# Altium PCB EST_MainV20.PcbDoc (part 1 of 8)
Units mm, origin at the board's own origin, x right, y up, seen from the top; angles counter-clockwise.
Board outline 69.72 x 115.32 mm, 2 copper layers (Top Layer, Bottom Layer); 330 components, 239 nets, 1066 pads, 416 vias.
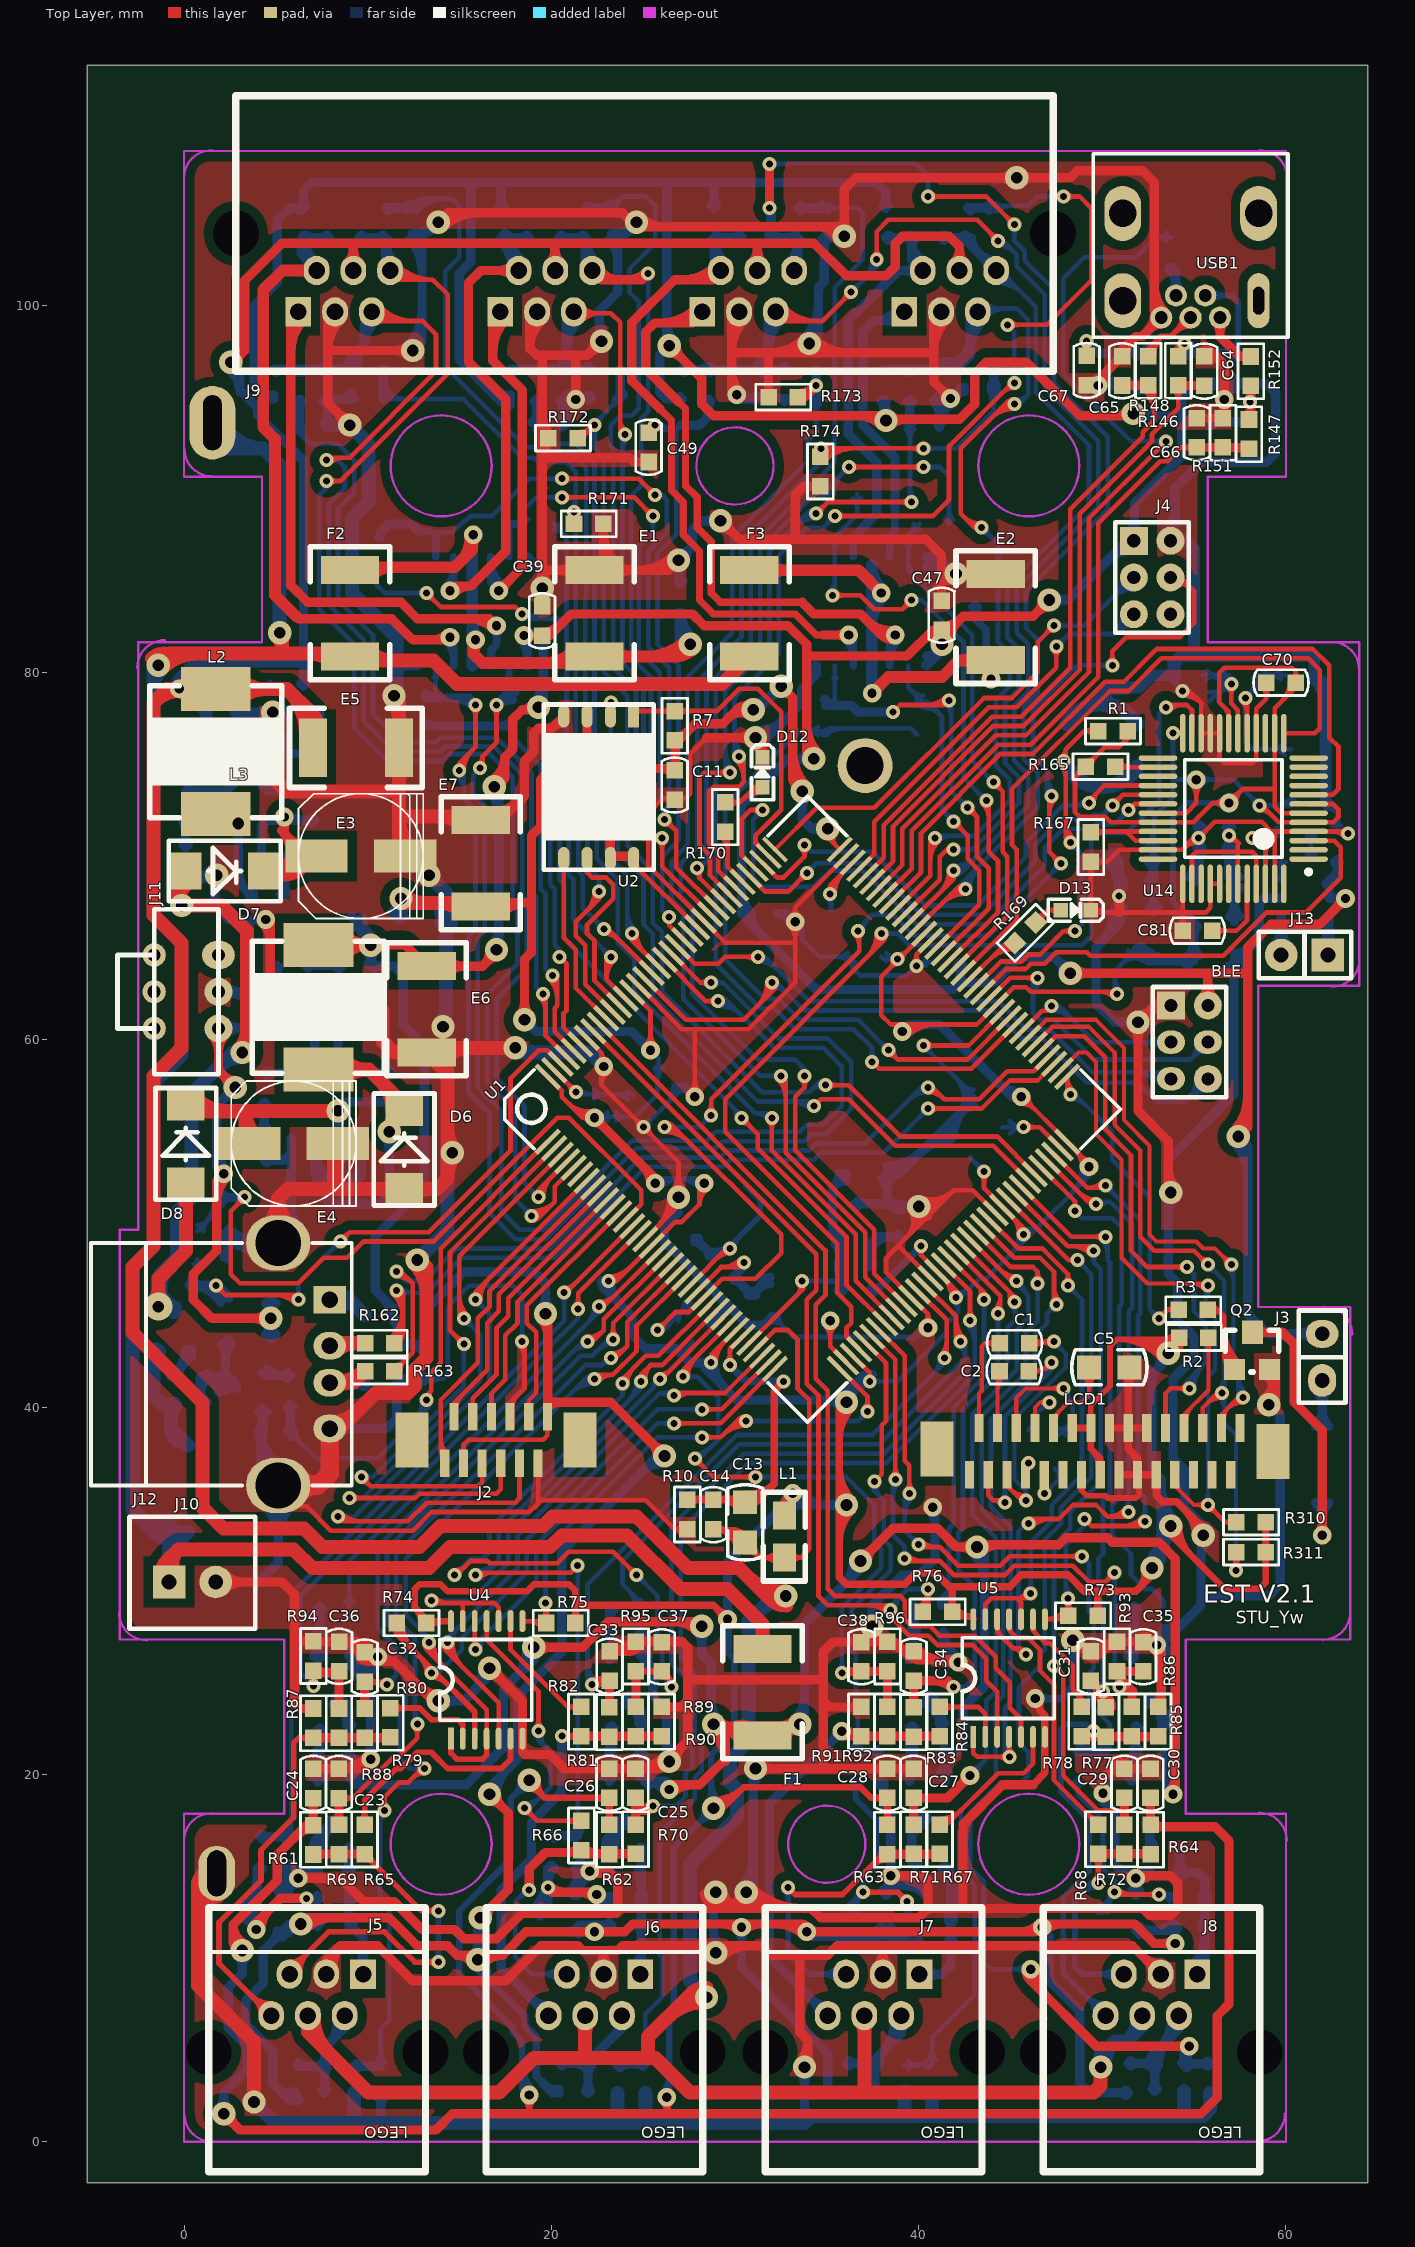
[diagram p0: Top Layer view]
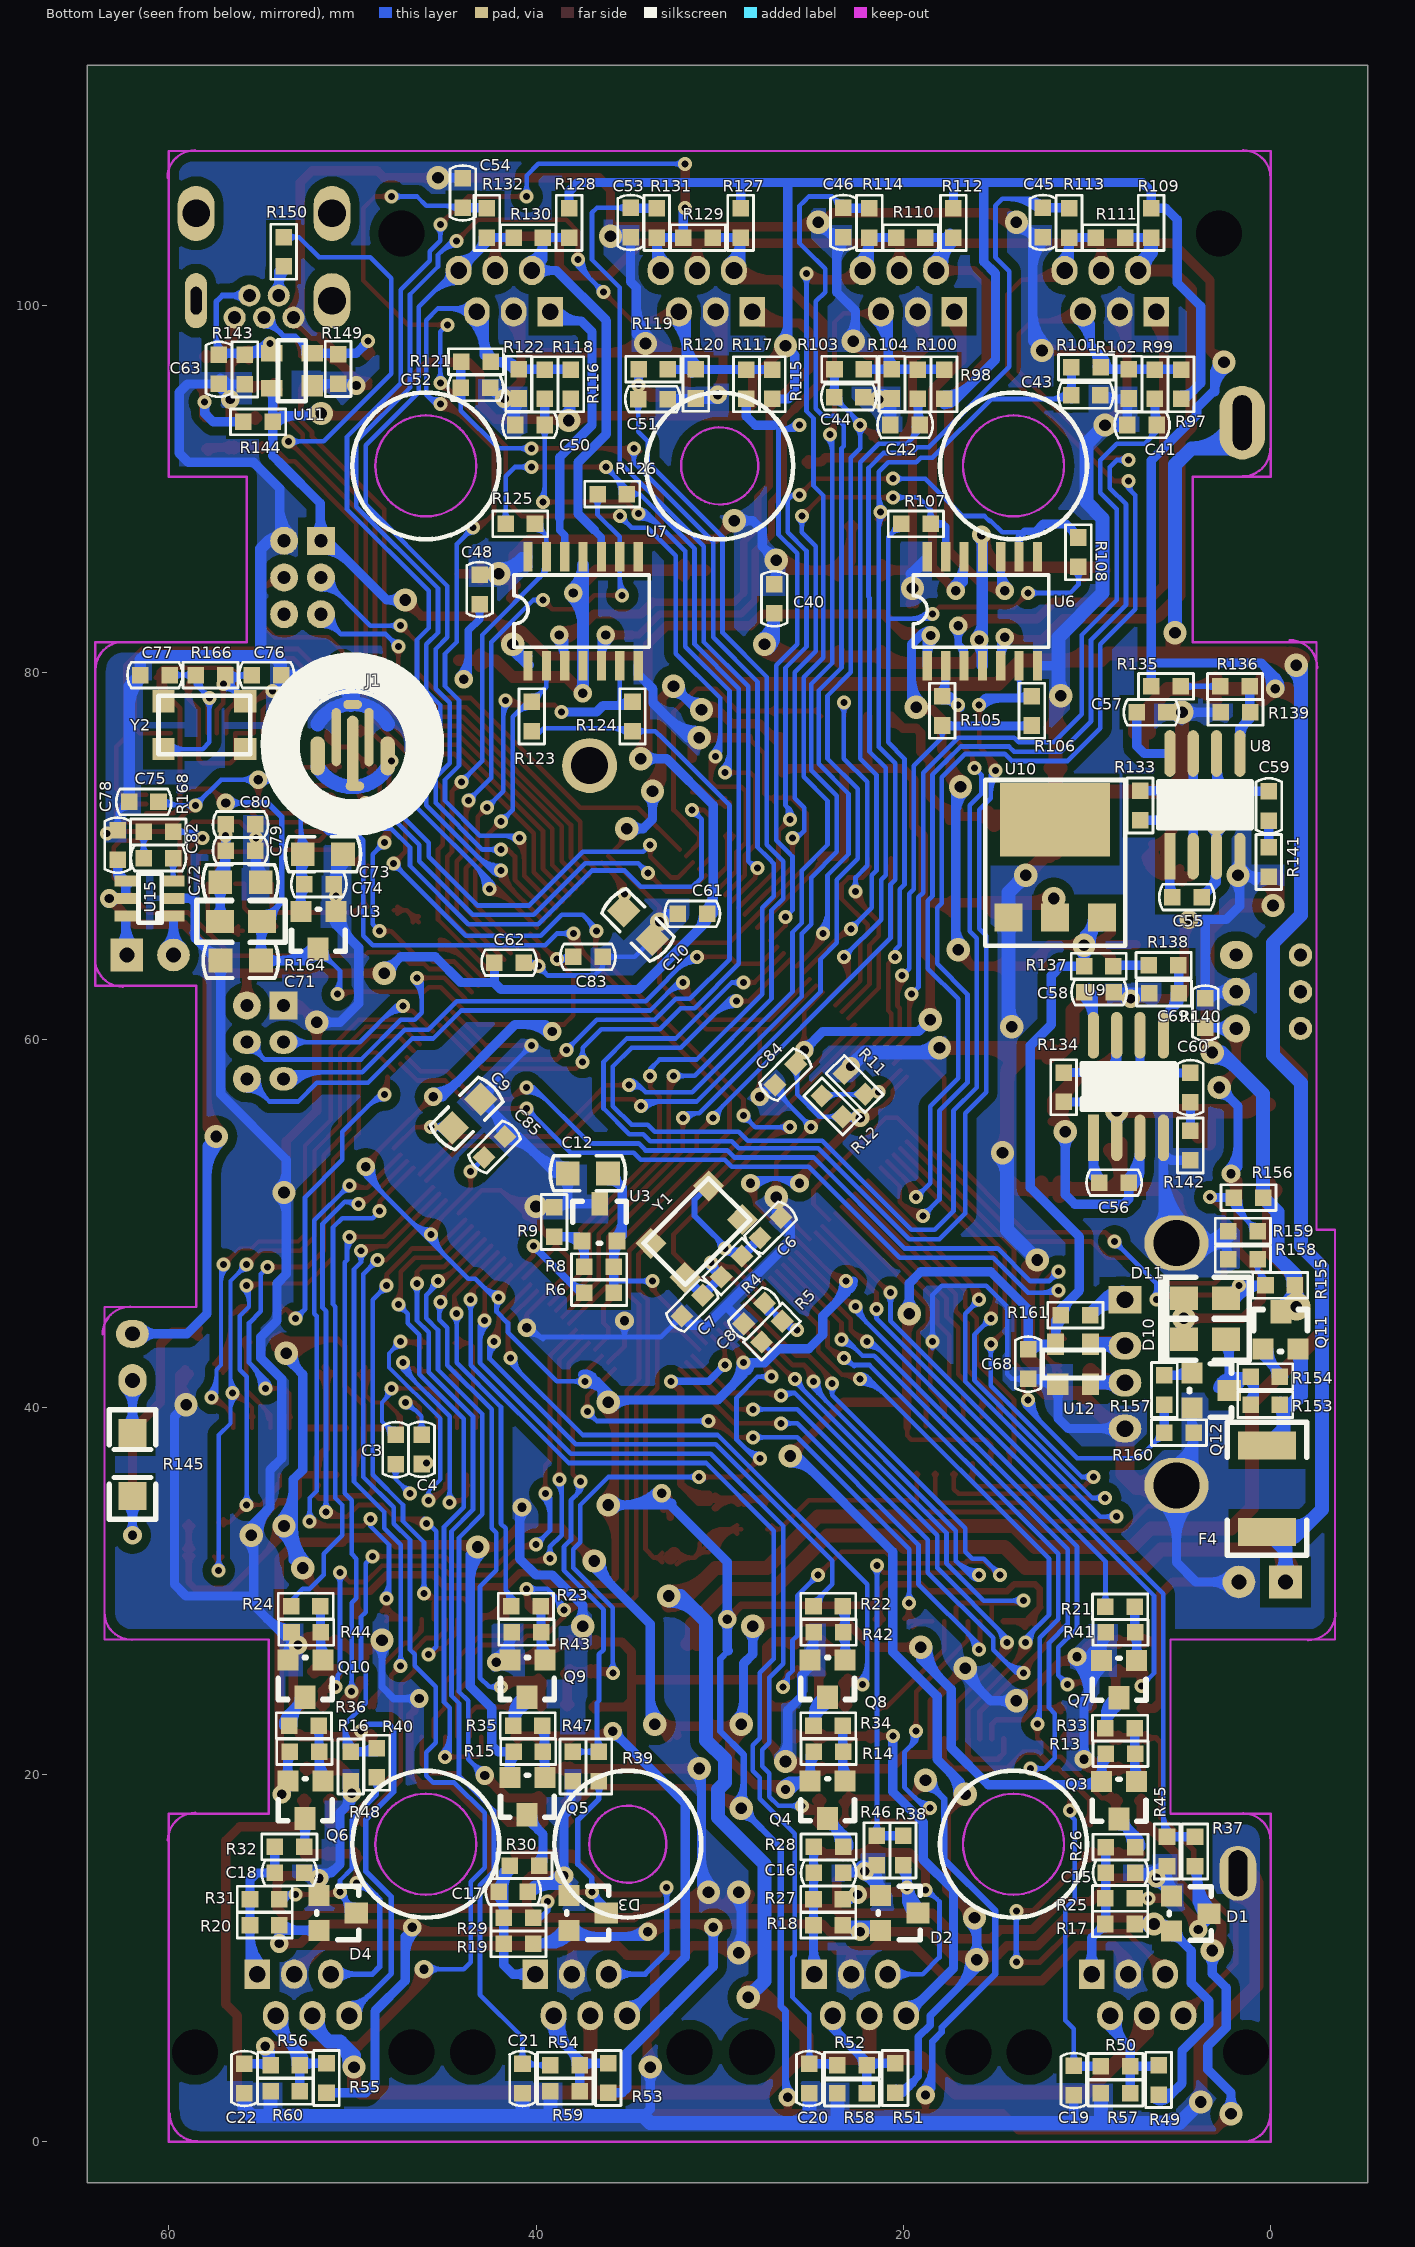
[diagram p1: Bottom Layer view, seen from below]

## Layer stack, top to bottom
Top Layer: signal copper 0.0356
Dielectric: prepreg 0.32, FR-4, Dk 4.8
Bottom Layer: signal copper 0.0356

## Board outline
-5.278,113.074 64.445,113.074 64.445,-2.242 -5.278,-2.242

## Design rules (kind name [scope] priority, off if disabled: settings)
Clearance Clearance_1 [All] p1 off: gap=0.508
Clearance [All] p2: gap=0.152
ComponentClearance [All] p1 off: gap=0.254 collisioncheckmode=3 verticalgap=0.254 showdistances=FALSE
HoleSize [All] p1: absolutevalues=TRUE maxlimit=3.81 minlimit=0.025 maxpercent=80.000 minpercent=20.000
HoleToHoleClearance [All] p1 off: gap=0.254 allowstackedmicrovias=TRUE
MinimumSolderMaskSliver [All] p1 off: minsoldermaskwidth=0.254
PlaneConnect [All] p1: planeconnectstyle=Direct reliefexpansion=0.508 reliefentries=4 reliefconductorwidth=0.254 reliefairgap=0.254
PolygonConnect [All] p1: connectstyle=Direct reliefconductorwidth=0.254 reliefentries=4 polygonreliefangle="90 Angle"
RoutingVias [All] p1: holewidth=0.3 width=0.42 viastyle="Through Hole" minholewidth=0.3 minwidth=0.42 maxholewidth=1.524 maxwidth=3.81
SilkToSilkClearance [All] p1 off: silktosilkclearance=0.254
SilkscreenOverComponentPads [All] p1: minsilkscreentomaskgap=0.254
SolderMaskExpansion [All] p1: expansion=0.102
TestPointUsage [All] p1: valid=0 allowmultiple=FALSE
Testpoint [All] p1: side=15 testpointundercomponent=TRUE minsize=1.016 maxsize=2.54 preferedsize=1.524 minholesize=0 maxholesize=1.016 preferedholesize=0.813 testpointgrid=0.025 style=1023 order=0-112345678
Width [All] p1: maxlimit=2.54 minlimit=0.2 preferedwidth=0.2 toplayer_prefwidth=0.5 minimp=50.000000 maximp=50.000000 favimp=50.000000
17 further rules are at their usual default settings.

## Classes and differential pairs
component class Designator1: C15 C16 C17 C18 C19 C20 C21 C22 C23 C24 C25 C26 C27 C28 C29 C30 C31 C32 C33 C34 C35 C36 C37 C38 D1 D2 D3 D4 F1 J5 J6 J7 J8 Q3 Q4 Q5 Q6 Q7 Q8 Q9 Q10 R13 R14 R15 R16 R17 R18 R19 R20 R21 R22 R23 R24 R25 R26 R27 R28 R29 R30 R31 R32 R33 R34 R35 R36 R37 R38 R39 R40 R41 R42 R43 R44 R45 R46 R47 R48 R49 R50 R51 R52 R53 R54 R55 R56 R57 R58 R59 R60 R61 R62 R63 R64 R65 R66 R67 R68 R69 R70 R71 R72 R73 R74 R75 R76 R77 R78 R79 R80 R81 R82 R83 R84 R85 R86 R87 R88 R89 R90 R91 R92 R93 R94 R95 R96 U4 U5
component class Designator2: C39 C40 C41 C42 C43 C44 C45 C46 C47 C48 C49 C50 C51 C52 C53 C54 E1 E2 F2 F3 J9 R97 R98 R99 R100 R101 R102 R103 R104 R105 R106 R107 R108 R109 R110 R111 R112 R113 R114 R115 R116 R117 R118 R119 R120 R121 R122 R123 R124 R125 R126 R127 R128 R129 R130 R131 R132 R171 R172 R173 R174 U6 U7
component class Designator3: C70 C71 C72 C73 C74 C75 C76 C77 C78 C79 C80 C81 C82 J13 R164 R165 R166 R167 R168 U13 U14 U15 Y2
component class EST_MainV20: BLE C1 C2 C3 C4 C5 C6 C7 C8 C9 C10 C11 C12 C13 C14 C83 C84 C85 D12 D13 J1 J2 J3 J4 L1 LCD1 Q2 R1 R2 R3 R4 R5 R6 R7 R8 R9 R10 R11 R12 R145 R169 R170 R310 R311 U1 U2 U3 Y1
component class Designator4: C55 C56 C57 C58 C59 C60 C61 C62 C63 C64 C65 C66 C67 C68 C69 D6 D7 D8 D10 D11 E3 E4 E5 E6 E7 F4 J10 J11 J12 L2 L3 Q11 Q12 R133 R134 R135 R136 R137 R138 R139 R140 R141 R142 R143 R144 R146 R147 R148 R149 R150 R151 R152 R153 R154 R155 R156 R157 R158 R159 R160 R161 R162 R163 U8 U9 U10 U11 U12 USB1

## Components (designator, comment, footprint, x,y, rotation, side; value= is the part's Value field where it differs from the comment)
BLE "CON6" H2_2.0mm_2*3#1 53.746,61.874 r270 top locked
C1 "105" CAP_0603 45.212,43.485 r0 top
C2 "105" CAP_0603 45.212,41.961 r180 top
C3 "105" CAP_0603 47.65,37.694 r270 bottom
C4 "105" CAP_0603 46.228,37.694 r90 bottom
C5 "105" CAP_0805 50.394,42.164 r180 top
C6 "20pF" CAP_0603 27.229,49.784 r315 bottom
C7 "20pF" CAP_0603 31.496,45.517 r135 bottom
C8 "104" CAP_0603 28.124,45.093 r135 bottom
C9 "20pF" CAP_0805 43.79,55.982 r135 bottom
C10 "20pF" CAP_0805 34.442,66.243 r45 bottom
C11 "104" CAP_0603 26.721,73.863 r90 top
C12 "20pF" CAP_0805 37.186,52.73 r180 bottom
C13 "20pF" CAP_0805 30.556,33.731 r270 top
C14 "104" CAP_0603 28.829,34.138 r90 top
C15 "330pF" CAP_0603 8.184,14.649 r180 bottom
C16 "330pF" CAP_0603 24.079,14.63 r180 bottom
C17 "330pF" CAP_0603 41.25,13.614 r180 bottom
C18 "330pF" CAP_0603 53.442,14.63 r180 bottom
C19 "330pF" CAP_0603 10.724,3.346 r270 bottom
C20 "330pF" CAP_0603 25.121,3.454 r270 bottom
C21 "330pF" CAP_0603 40.742,3.454 r270 bottom
C22 "330pF" CAP_0603 55.88,3.454 r270 bottom
C23 "10pF" CAP_0603 8.438,19.5 r90 top
C24 "104" CAP_0603 7.041,19.5 r90 top
C25 "10pF" CAP_0603 24.587,19.507 r90 top
C26 "104" CAP_0603 23.165,19.507 r90 top
C27 "10pF" CAP_0603 39.726,19.507 r90 top
C28 "104" CAP_0603 38.303,19.507 r90 top
C29 "10pF" CAP_0603 51.206,19.507 r90 top
C30 "104" CAP_0603 52.629,19.507 r90 top
C31 "10pF" CAP_0603 49.378,25.908 r270 top
C32 "10pF" CAP_0603 9.835,25.85 r270 top
C33 "10pF" CAP_0603 23.165,25.908 r270 top
C34 "10pF" CAP_0603 39.726,25.908 r270 top
C35 "10pF" CAP_0603 52.222,26.416 r270 top
C36 "47pF" CAP_0603 8.438,26.434 r270 top
C37 "10pF" CAP_0603 26.01,26.416 r270 top
C38 "10pF" CAP_0603 36.881,26.416 r270 top
C39 "104" CAP_0603 19.507,82.804 r90 top
C40 "104" CAP_0603 27.026,84.023 r270 bottom
C41 "100pF" CAP_0603 7.01,93.472 r180 bottom
C42 "100pF" CAP_0603 19.914,93.472 r180 bottom
C43 "100pF" CAP_0603 10.058,95.098 r0 bottom
C44 "100K" CAP_0603 22.962,94.996 r0 bottom
C45 "100pF" CAP_0603 12.395,104.496 r90 bottom
C46 "100pF" CAP_0603 23.266,104.496 r90 bottom
C47 "104" CAP_0603 41.25,83.109 r90 top
C48 "104" CAP_0603 43.078,84.531 r270 bottom
C49 "100pF" CAP_0603 25.298,92.253 r90 top
C50 "100pF" CAP_0603 40.335,93.472 r180 bottom
C51 "100K" CAP_0603 33.63,94.894 r0 bottom
C52 "100K" CAP_0603 43.282,95.504 r0 bottom
C53 "100pF" CAP_0603 34.849,104.496 r90 bottom
C54 "100pF" CAP_0603 43.993,106.121 r270 bottom
C55 "103" CAP_0603 4.572,67.767 r180 bottom
C56 "103" CAP_0603 8.534,52.222 r180 bottom
C57 "104" CAP_0603 6.502,77.826 r180 bottom
C58 "471" CAP_0603 9.347,62.586 r180 bottom
C59 "3.9nF" CAP_0603 0.102,72.746 r270 bottom
C60 "3.9nF" CAP_0603 4.369,57.404 r270 bottom
C61 "104" CAP_0603 31.496,66.853 r180 bottom
C62 "104" CAP_0603 41.453,64.211 r0 bottom
C63 "15P" CAP_0603 57.277,96.52 r270 bottom
C64 "15P" CAP_0603 55.55,96.418 r270 top
C65 "15P" CAP_0603 51.079,96.418 r90 top
C66 "104" CAP_0603 55.143,93.066 r270 top
C67 "15P" CAP_0603 49.149,96.437 r90 top
C68 "10uF" CAP_0603 13.208,42.349 r270 bottom
C69 "104" CAP_0603 3.556,61.468 r270 bottom
C70 "104" CAP_0603 59.741,79.451 r180 top
C71 "10uF" CAP_0805 56.083,64.313 r180 bottom
C72 "10uF" CAP_0805 56.083,68.58 r0 bottom
C73 "10uF" CAP_0805 51.613,70.104 r180 bottom
C74 "104" CAP_0603 51.816,68.478 r0 bottom
C75 "104" CAP_0603 61.366,72.949 r180 bottom
C76 "20pF" CAP_0603 54.661,79.858 r0 bottom
C77 "20pF" CAP_0603 60.757,79.858 r180 bottom
C78 "104" CAP_0603 62.789,70.612 r270 bottom
C79 "104" CAP_0603 56.083,70.307 r0 bottom
C80 "104" CAP_0603 56.083,71.73 r0 bottom
C81 "105" CAP_0603 55.169,65.938 r0 top
C82 "104" CAP_0603 60.554,69.901 r0 bottom
C83 "104" CAP_0603 37.186,64.516 r180 bottom
C84 "104" CAP_0603 26.416,58.115 r315 bottom
C85 "104" CAP_0603 42.266,54.153 r135 bottom
D1 "BAT54S" BAT54S 3.358,13.887 r270 bottom
D2 "BAT54S" BAT54S 19.202,13.919 r270 bottom
D3 "BAT54S" BAT54S 36.17,13.919 r270 bottom
D4 "BAT54S" BAT54S 49.784,13.919 r270 bottom
D6 "1N5819" 1N4007SMD 11.989,52.121 r90 top
D7 "1N4007" 1N4007SMD 0.305,69.19 r0 top
D8 "1N4007" 1N4007SMD 0.102,52.426 r90 top
D10 "1N4007" LED-0805 2.438,43.688 r0 bottom
D11 "1N4007" LED-0805 2.438,45.923 r0 bottom
D12 "LED" LED-0603 31.496,74.574 r90 top
D13 "LED" LED-0603 48.565,67.056 r0 top
E1 "100uF/16V" 1812 22.352,80.874 r90 top
E2 "100uF/16V" 1812 44.196,80.67 r90 top
E3 "220uF" KLF_CD0.254 7.214,70.002 r0 top
E4 "220uF" KLF_CD0.254 3.556,54.356 r0 top
E5 "220uF" 1812 7.01,75.895 r0 top
E6 "220uF" 1812 13.208,64.008 r270 top
E7 "220uF" 1812 16.154,67.259 r90 top
F1 "FUSE" 1812 31.496,26.822 r270 top
F2 "FUSE" 1812 9.042,80.874 r90 top
F3 "FUSE" 1812 30.785,80.874 r90 top
F4 "FUSE" 1812 0.203,37.897 r270 bottom
J1 "CON2" EST_DZ_SW2 49.987,76.098 r90 bottom
J2 "KEY_CON" FPC_12P 16.866,38.202 r180 top locked
J3 "CON2" SIP2#1 61.976,43.993 r0 top
J4 "Header 3X2" H2_2.0mm_2*3#2 51.714,87.173 r270 top locked
J5 "CON6" Lego_RJ11 7.246,5.251 r180 top locked (schematic designator PSA1)
J6 "CON6" Lego_RJ11 22.346,5.251 r180 top locked (schematic designator PSB1)
J7 "CON6" Lego_RJ11 37.546,5.251 r180 top locked (schematic designator PSC1)
J8 "CON6" Lego_RJ11 52.676,5.251 r180 top locked (schematic designator PSD1)
J9 "CON24" RJ11-4 19,104.811 r0 top locked (schematic designator PMotor)
J10 "CON2" SIP2CON -0.813,30.48 r0 top
J11 "CON3" EST_POW_SW -1.626,64.618 r270 top locked
J12 "CON6" USB-A 7.93,42.335 r270 top locked (schematic designator J1)
J13 "CON2" SIP2#2 62.281,64.618 r270 top
L1 "10UH" 0805 32.69,31.801 r90 top
L2 "220uH" L_7x7 1.727,75.692 r90 top
L3 "10uH" L_7x7 7.315,61.773 r90 top
LCD1 "UC1638-180*128" FPC_30P 49.886,37.592 r180 top locked
Q2 "SS8050" 8050SMD 56.693,44.196 r0 top
Q3 "SS8550" 8050SMD 6.787,17.443 r0 bottom
Q4 "SS8550" 8050SMD 22.657,17.475 r0 bottom
Q5 "SS8550" 8050SMD 39.014,17.678 r0 bottom
Q6 "SS8550" 8050SMD 51.105,17.475 r0 bottom
Q7 "SS8050" 8050SMD 6.787,24.047 r0 bottom
Q8 "SS8050" 8050SMD 22.657,24.079 r0 bottom
Q9 "SS8050" 8050SMD 39.014,24.079 r0 bottom
Q10 "SS8050" 8050SMD 51.105,24.079 r0 bottom
Q11 "IRF530" 8050SMD 0.914,45.314 r180 bottom
Q12 "SS8050" 8050SMD 2.134,42.367 r270 bottom
R1 "10K" RES_0603 50.572,76.81 r0 top
R2 "10K" RES_0603 54.966,43.79 r0 top
R3 "1K" RES_0603 54.966,45.314 r180 top
R4 "4.7M" RES_0603 29.362,47.65 r135 bottom
R5 "10K" RES_0603 27.147,44.115 r315 bottom
R6 "330" RES_0603 36.576,46.228 r180 bottom
R7 "10K" RES_0603 26.721,77.114 r270 top
R8 "0" RES_0603 36.576,47.65 r180 bottom
R9 "/" RES_0603 39.014,50.089 r270 bottom
R10 "0" RES_0603 27.407,34.138 r90 top
R11 "/" RES_0603 22.657,57.607 r225 bottom
R12 "10K" RES_0603 23.876,56.388 r225 bottom
R13 "4.7K" RES_0603 8.184,21.126 r180 bottom
R14 "4.7K" RES_0603 24.079,21.234 r180 bottom
R15 "4.7K" RES_0603 40.437,21.234 r180 bottom
R16 "4.7K" RES_0603 52.629,21.234 r180 bottom
R17 "10K" RES_0603 8.184,11.855 r0 bottom
R18 "10K" RES_0603 24.079,11.786 r0 bottom
R19 "10K" RES_0603 40.945,10.77 r0 bottom
R20 "10K" RES_0603 54.762,11.786 r0 bottom
R21 "2K" RES_0603 8.184,29.127 r0 bottom
R22 "2K" RES_0603 24.079,29.159 r0 bottom
R23 "2K" RES_0603 40.538,29.159 r0 bottom
R24 "2K" RES_0603 52.527,29.159 r0 bottom
R25 "1K" RES_0603 8.184,13.252 r0 bottom
R26 "330" RES_0603 8.184,16.046 r180 bottom
R27 "1K" RES_0603 24.079,13.208 r0 bottom
R28 "330" RES_0603 24.079,16.053 r180 bottom
R29 "1K" RES_0603 40.945,12.192 r0 bottom
R30 "330" RES_0603 40.64,15.037 r180 bottom
R31 "1K" RES_0603 54.762,13.208 r0 bottom
R32 "330" RES_0603 53.442,16.053 r180 bottom
R33 "4.7K" RES_0603 8.184,22.523 r0 bottom
R34 "4.7K" RES_0603 24.079,22.657 r0 bottom
R35 "4.7K" RES_0603 40.437,22.657 r0 bottom
R36 "4.7K" RES_0603 52.629,22.657 r0 bottom
R37 "1K" RES_0603 4.12,15.792 r90 bottom
R38 "1K" RES_0603 20.015,15.85 r90 bottom
R39 "1K" RES_0603 36.576,20.422 r90 bottom
R40 "1K" RES_0603 48.666,20.625 r90 bottom
R41 "2K" RES_0603 8.184,27.73 r180 bottom
R42 "2K" RES_0603 24.079,27.737 r180 bottom
R43 "2K" RES_0603 40.538,27.737 r180 bottom
R44 "2K" RES_0603 52.527,27.737 r180 bottom
R45 "2K" RES_0603 5.644,15.792 r90 bottom
R46 "2K" RES_0603 21.438,15.85 r90 bottom
R47 "2K" RES_0603 37.998,20.422 r90 bottom
R48 "2K" RES_0603 50.089,20.422 r90 bottom
R49 "10K" RES_0603 6.096,3.353 r90 bottom
R50 "4.7K" RES_0603 8.438,4.108 r0 bottom
R51 "10K" RES_0603 20.447,3.454 r90 bottom
R52 "4.7K" RES_0603 22.784,4.166 r0 bottom
R53 "10K" RES_0603 36.068,3.454 r90 bottom
R54 "4.7K" RES_0603 38.405,4.166 r0 bottom
R55 "10K" RES_0603 51.41,3.454 r90 bottom
R56 "4.7K" RES_0603 53.645,4.166 r0 bottom
R57 "18K" RES_0603 8.433,2.642 r0 bottom
R58 "18K" RES_0603 22.784,2.642 r0 bottom
R59 "18K" RES_0603 38.405,2.743 r0 bottom
R60 "18K" RES_0603 53.645,2.743 r0 bottom
R61 "100K" RES_0603 7.041,16.452 r270 top
R62 "100K" RES_0603 23.165,16.459 r270 top
R63 "100K" RES_0603 38.303,16.459 r270 top
R64 "100K" RES_0603 52.629,16.459 r270 top
R65 "330" RES_0603 9.835,16.452 r90 top
R66 "220" RES_0603 21.641,16.662 r90 top
R67 "220" RES_0603 41.148,16.459 r90 top
R68 "220" RES_0603 49.784,16.459 r90 top
R69 "4.7K" RES_0603 8.438,16.452 r90 top
R70 "4.7K" RES_0603 24.587,16.459 r90 top
R71 "4.7K" RES_0603 39.726,16.459 r90 top
R72 "4.7K" RES_0603 51.206,16.459 r90 top
R73 "4.7K" RES_0603 48.971,28.651 r180 top
R74 "4.7K" RES_0603 12.395,28.245 r180 top
R75 "4.7K" RES_0603 20.523,28.245 r180 top
R76 "4.7K" RES_0603 41.046,28.854 r180 top
R77 "4.7K" RES_0603 50.19,22.86 r270 top
R78 "220" RES_0603 48.87,22.86 r90 top
R79 "4.7K" RES_0603 9.835,22.802 r270 top
R80 "330" RES_0603 11.232,22.802 r90 top
R81 "4.7K" RES_0603 23.165,22.86 r270 top
R82 "220" RES_0603 21.641,22.86 r90 top
R83 "4.7K" RES_0603 39.726,22.86 r270 top
R84 "220" RES_0603 41.148,22.86 r90 top
R85 "430K" RES_0603 53.035,22.86 r90 top
R86 "220K" RES_0603 51.613,22.86 r90 top
R87 "430K" RES_0603 7.041,22.777 r90 top
R88 "220K" RES_0603 8.438,22.777 r90 top
R89 "430K" RES_0603 26.01,22.86 r90 top
R90 "220K" RES_0603 24.587,22.86 r90 top
R91 "430K" RES_0603 36.881,22.86 r90 top
R92 "220K" RES_0603 38.303,22.86 r90 top
R93 "220K" RES_0603 50.8,26.416 r90 top
R94 "220K" RES_0603 7.041,26.434 r90 top
R95 "220K" RES_0603 24.587,26.416 r90 top
R96 "220K" RES_0603 38.303,26.416 r90 top
R97 "100K" RES_0603 4.877,95.707 r270 bottom
R98 "RES" RES_0603 17.78,95.707 r270 bottom
R99 "4.7K" RES_0603 6.299,95.707 r270 bottom
R100 "4.7K" RES_0603 19.202,95.707 r270 bottom
R101 "100K" RES_0603 10.058,96.622 r180 bottom
R102 "200K" RES_0603 7.722,95.707 r90 bottom
R103 "100K" RES_0603 22.962,96.52 r180 bottom
R104 "200K" RES_0603 20.625,95.707 r90 bottom
R105 "4.7K" RES_0603 17.882,77.927 r270 bottom
R106 "4.7K" RES_0603 13.005,77.927 r270 bottom
R107 "4.7K" RES_0603 19.304,88.087 r0 bottom
R108 "4.7K" RES_0603 10.465,86.563 r270 bottom
R109 "100K" RES_0603 6.502,104.496 r270 bottom
R110 "100K" RES_0603 17.272,104.496 r270 bottom
R111 "100K" RES_0603 8.738,103.683 r180 bottom
R112 "100K" RES_0603 19.609,103.683 r180 bottom
R113 "4.7K" RES_0603 10.973,104.496 r270 bottom
R114 "4.7K" RES_0603 21.844,104.496 r270 bottom
R115 "100K" RES_0603 27.127,95.707 r270 bottom
R116 "100K" RES_0603 38.1,95.707 r270 bottom
R117 "4.7K" RES_0603 28.55,95.707 r270 bottom
R118 "4.7K" RES_0603 39.522,95.707 r270 bottom
R119 "100K" RES_0603 33.63,96.52 r180 bottom
R120 "200K" RES_0603 31.293,95.707 r90 bottom
R121 "100K" RES_0603 43.282,96.926 r180 bottom
R122 "200K" RES_0603 40.945,95.707 r90 bottom
R123 "4.7K" RES_0603 40.234,77.622 r270 bottom
R124 "4.7K" RES_0603 34.747,77.622 r270 bottom
R125 "4.7K" RES_0603 40.843,88.087 r0 bottom
R126 "4.7K" RES_0603 35.865,89.713 r180 bottom
R127 "100K" RES_0603 28.854,104.496 r270 bottom
R128 "100K" RES_0603 38.202,104.496 r270 bottom
R129 "100K" RES_0603 31.191,103.683 r180 bottom
R130 "100K" RES_0603 40.437,103.683 r180 bottom
R131 "4.7K" RES_0603 33.426,104.496 r270 bottom
R132 "4.7K" RES_0603 42.672,104.496 r270 bottom
R133 "0.33" RES_0603 7.112,72.746 r90 bottom
R134 "0.33" RES_0603 11.278,57.404 r90 bottom
R135 "3K" RES_0603 5.69,79.248 r0 bottom
R136 "3K" RES_0603 1.93,79.248 r0 bottom
R137 "3K" RES_0603 9.347,64.008 r0 bottom
R138 "3K" RES_0603 5.817,64.059 r0 bottom
R139 "1K" RES_0603 1.93,77.826 r180 bottom
R140 "1K" RES_0603 5.817,62.535 r180 bottom
R141 "1K" RES_0603 0.102,69.698 r270 bottom
R142 "1K" RES_0603 4.369,54.254 r270 bottom
R143 "15K" RES_0603 55.855,96.52 r270 bottom
R144 "NC" RES_0603 55.147,93.653 r180 bottom
R145 "100" 1206 61.976,35.154 r90 bottom
R146 "22" RES_0603 54.127,96.418 r90 top
R147 "16K" RES_0603 57.988,92.964 r90 top
R148 "22" RES_0603 52.502,96.418 r90 top
R149 "15K" RES_0603 50.775,96.52 r90 bottom
R150 "1K" RES_0603 53.746,102.921 r270 bottom
R151 "22K" RES_0603 56.566,93.066 r270 top
R152 "0" RES_0603 58.09,96.418 r270 top
R153 "10K" RES_0603 0.305,40.132 r180 bottom
R154 "1K" RES_0603 0.305,41.656 r180 bottom
R155 "20K" RES_0603 -0.508,46.634 r180 bottom
R156 "30K" RES_0603 1.219,51.41 r180 bottom
R157 "2K" RES_0603 5.791,40.945 r270 bottom
R158 "10K" RES_0603 1.524,48.057 r180 bottom
R159 "10K" RES_0603 1.524,49.581 r180 bottom
R160 "10K" RES_0603 4.978,38.608 r0 bottom
R161 "4R7" RES_0603 10.643,45.009 r180 bottom
R162 "22" RES_0603 10.668,43.485 r180 top
R163 "22" RES_0603 10.668,41.961 r180 top
R164 "10" 0805 57.201,66.446 r180 bottom
R165 "100K" RES_0603 49.886,74.879 r0 top
R166 "4.7M" RES_0603 57.709,79.858 r0 bottom
R167 "100K" RES_0603 49.378,70.51 r270 top
R168 "10" RES_0603 60.554,71.323 r0 bottom
R169 "1K" RES_0603 45.822,65.837 r225 top
R170 "1K" RES_0603 29.464,72.136 r270 top
R171 "100K" RES_0603 22.047,88.087 r180 top
R172 "100K" RES_0603 20.625,92.761 r0 top
R173 "100K" RES_0603 32.614,94.996 r0 top
R174 "100K" RES_0603 34.646,90.932 r90 top
R310 "2K" RES_0603 58.115,33.731 r180 top
R311 "2K" RES_0603 58.115,32.106 r180 top
U1 "STM32F407ZET6" LQFP144 19.812,54.458 r45 top locked
U2 "W25Q64" WSON8 24.486,77.622 r270 top
U3 "TL431" TL431(SOT23) 37.998,51.206 r180 bottom
U4 "74F125" TSSOP14 14.529,21.946 r90 top
U5 "74F125" TSSOP14 42.977,22.047 r90 top
U6 "LB1836M" LB1836 15.646,83.414 r90 bottom
U7 "LB1836M" LB1836 37.389,83.414 r90 bottom
U8 "MP2307" SO-8 5.486,70.002 r90 bottom
U9 "MP2307" SO-8 9.652,54.661 r90 bottom
U10 "LT1117" LT1117SMD 15.545,65.126 r180 bottom
U11 "PRTR5V0U2X" SOT23-4 52.197,95.606 r0 bottom
U12 "PRTR5V0U2X" SOT23-4 11.582,41.25 r90 bottom
U13 "XC6206P" 8050SMD 50.394,64.821 r0 bottom
U14 "VS1053B" LQFP48 62.789,66.954 r180 top locked
U15 "PAM8301" SOT23-6New 59.741,66.751 r90 bottom
USB1 "USB-B(Mini)" USB_MINI_5P_DIP 51.11,100.247 r0 top locked (schematic designator J2)
Y1 "8MHz" XTAL_5032 28.346,50.19 r315 bottom
Y2 "12.28MHz" XTAL_5032 60.554,78.74 r180 bottom

## Footprints (in the part's own frame and the unit in brackets; to place one, negate y for a bottom-side part, rotate by r counter-clockwise, add the part's x,y. Pads: shape width x height; smd on the part's side, far side on the other; paste and mask are expansions set on the pad)
1N4007SMD [mil]
  rect 70x80 smd: 1(-10,0) 2(160,0)
  silkscreen extent -45,-65 195,65
0805 [mil]
  rect 60x50 smd: 1(0,-0.06) 2(90,-0.06)
  silkscreen extent -50,-45 140,45
1206 [mil]
  rect 60x60 smd: 1(0,0) 2(135,0)
  silkscreen extent -50,-50 185,50
1812 [mil]
  rect 60x125 smd: 1(0,0) 2(185,0)
  silkscreen extent -50,-85 235,85
8050SMD [mil]
  rect 45x45 smd: 1(95,-85) 2(20,-85)
  rect 45x50 smd: 3(58,-5)
  silkscreen extent 0,-90 115,0
BAT54S [mil]
  rect 45x45 smd: 1(20,-80) 3(95,-80)
  rect 45x50 smd: 2(58,0)
  silkscreen extent 0,-85 115,5
CAP_0603 [mm]
  rect 0.9x0.9 smd: 1(-0.79,0.004) 2(0.81,0.004)
  silkscreen extent -1.49,-0.7 1.51,0.7
CAP_0805 [mm]
  rect 1.3x1.3 smd: 1(-1.091,-0.002) 2(1.109,-0.002)
  silkscreen extent -2.04,-0.95 2.06,0.95
EST_DZ_SW2 [mil]
  oval 20x40 smd: 1(-90,-5) 2(85,0)
  oval 83.74x31.5 smd: 1(-25,-75.01) 1(-25,75.01)
  oval 152.24x25 smd: 1(-15,0)
  oval 125x20 smd: 2(15,-35) 2(15,35)
  Top Layer lines w31.5: 43.27,-75.31 ccw(c-0.04,-0.3) 86.57,0 ccw(c-0.04,-0.3) 43.27,74.71 ; -48.31,-75.01 cw(c-5,0) -48.31,75.01
  silkscreen extent -123,-118 113,118
EST_POW_SW [mil]
  oval 60x70 hole 28: 1(0,137.8)
  round 60 hole 28: 2(78.74,137.8) 3(157.48,137.8)
  round 50 hole 28: 4(0,0) 5(78.74,0) 6(157.48,0)
  silkscreen extent -98,-79 256,138
FPC_12P [mm]
  rect 1.8x3 smd: 0(-4.699,0) 0(4.445,0)
  rect 0.5x1.5 smd: 1(-2.921,-1.27) 2(-2.413,1.27) 3(-1.905,-1.27) 4(-1.397,1.27) 5(-0.889,-1.27) 6(-0.381,1.27) 7(0.127,-1.27) 8(0.635,1.27) 9(1.143,-1.27) 10(1.651,1.27) 11(2.159,-1.27) 12(2.667,1.27)
FPC_30P [mm]
  rect 1.8x3 smd: 0(-9.398,0) 0(8.89,-0.127)
  rect 0.5x1.5 smd: 1(-7.62,-1.27) 2(-7.112,1.27) 3(-6.604,-1.27) 4(-6.096,1.27) 5(-5.588,-1.27) 6(-5.08,1.27) 7(-4.572,-1.27) 8(-4.064,1.27) 9(-3.556,-1.27) 10(-3.048,1.27) 11(-2.54,-1.27) 12(-2.032,1.27) 13(-1.524,-1.27) 14(-1.016,1.27) 15(-0.508,-1.27) 16(0,1.27) 17(0.508,-1.27) 18(1.016,1.27) 19(1.524,-1.27) 20(2.032,1.27) 21(2.54,-1.27) 22(3.048,1.27) 23(3.556,-1.27) 24(4.064,1.27) 25(4.572,-1.27) 26(5.08,1.27) 27(5.588,-1.27) 28(6.096,1.27) 29(6.604,-1.27) 30(7.112,1.27)
H2_2.0mm_2*3#1 [mil]
  rect 60x60 hole 28: 1(0,0)
  round 60 hole 28: 2(0,78.74) 6(157.48,78.74)
  oval 50x60 hole 28: 3(78.74,0) 4(78.74,78.74) 5(157.48,0)
  silkscreen extent -39,-39 197,118
H2_2.0mm_2*3#2 [mil]
  rect 60x60 hole 28: 1(0,0)
  round 60 hole 28: 2(0,78.74) 3(78.74,0) 4(78.74,78.74) 5(157.48,0) 6(157.48,78.74)
  silkscreen extent -39,-39 197,118
KLF_CD0.254 [mm]
  rect 3.4x1.8 smd: 1(0,0) 2(4.826,0)
  silkscreen extent -0.99,-3.4 5.81,3.4
L_7x7 [mm]
  rect 2.4x3.8 smd: 1(-3.4,0) 2(3.4,0)
  silkscreen extent -3.6,-3.6 3.6,3.6
LB1836 [mm]
  rect 1.6x0.5 smd: 1(-3.048,3.048) 2(-3.048,2.048) 3(-3.048,1.048) 4(-3.048,0.048) 5(-3.048,-0.952) 6(-3.048,-1.952) 7(-3.048,-2.952) 8(2.892,-2.952) 9(2.892,-1.952) 10(2.892,-0.952) 11(2.892,0.048) 12(2.892,1.048) 13(2.892,2.048) 14(2.892,3.048)
  silkscreen extent -2.03,-3.56 1.9,3.81
LED-0603 [mil]
  rect 31x31 smd: 1(-32.86,-0.1) 2(32.14,-0.1)
  silkscreen extent -59,-24 59,24
LED-0805 [mil]
  rect 60x50 smd: 1(0,0) 2(90,0)
  silkscreen extent -50,-45 140,45
Lego_RJ11 [mm]
  round 2.2 hole 2.5: 0(-5.9,0.381) 0(5.9,0.381)
  rect 1.4x1.6 hole 0.9: 1(-2.5,-3.873)
  oval 1.4x1.6 hole 0.9: 2(-1.5,-1.619) 3(-0.5,-3.873) 4(0.5,-1.619) 5(1.5,-3.873) 6(2.5,-1.619)
  silkscreen extent -5.9,-7.5 5.9,6.88
LQFP48 [mm]
  oval 2.1x0.3 smd: 1(1.556,-2.889) 2(1.556,-3.389) 3(1.556,-3.889) 4(1.556,-4.389) 5(1.556,-4.889) 6(1.556,-5.389) 7(1.556,-5.889) 8(1.556,-6.389) 9(1.556,-6.889) 10(1.556,-7.389) 11(1.556,-7.889) 12(1.556,-8.389) 25(9.756,-8.389) 26(9.756,-7.889) 27(9.756,-7.389) 28(9.756,-6.889) 29(9.756,-6.389) 30(9.756,-5.889) 31(9.756,-5.389) 32(9.756,-4.889) 33(9.756,-4.389) 34(9.756,-3.889) 35(9.756,-3.389) 36(9.756,-2.889)
  oval 0.3x2.1 smd: 13(2.906,-9.739) 14(3.406,-9.739) 15(3.906,-9.739) 16(4.406,-9.739) 17(4.906,-9.739) 18(5.406,-9.739) 19(5.906,-9.739) 20(6.406,-9.739) 21(6.906,-9.739) 22(7.406,-9.739) 23(7.906,-9.739) 24(8.406,-9.739) 37(8.406,-1.539) 38(7.906,-1.539) 39(7.406,-1.539) 40(6.906,-1.539) 41(6.406,-1.539) 42(5.906,-1.539) 43(5.406,-1.539) 44(4.906,-1.539) 45(4.406,-1.539) 46(3.906,-1.539) 47(3.406,-1.539) 48(2.906,-1.539)
  silkscreen extent 1.43,-8.29 8.31,-2.06
LQFP144 [mm]
  rect 1.8x0.254 smd: 1(-0.009,0.001) 2(-0.009,-0.499) 3(-0.009,-0.999) 4(-0.009,-1.499) 5(-0.009,-1.999) 6(-0.009,-2.499) 7(-0.009,-2.999) 8(-0.009,-3.499) 9(-0.009,-3.999) 10(-0.009,-4.499) 11(-0.009,-4.999) 12(-0.009,-5.499) 13(-0.009,-5.999) 14(-0.009,-6.499) 15(-0.009,-6.999) 16(-0.009,-7.499) 17(-0.009,-7.999) 18(-0.009,-8.499) 19(-0.009,-8.999) 20(-0.009,-9.499) 21(-0.009,-9.999) 22(-0.009,-10.499) 23(-0.009,-10.999) 24(-0.009,-11.499) 25(-0.009,-11.999) 26(-0.009,-12.499) 27(-0.009,-12.999) 28(-0.009,-13.499) 29(-0.009,-13.999) 30(-0.009,-14.499) 31(-0.009,-14.999) 32(-0.009,-15.499) 33(-0.009,-15.999) 34(-0.009,-16.499) 35(-0.009,-16.999) 36(-0.009,-17.499) 73(22.491,-17.499) 74(22.491,-16.999) 75(22.491,-16.499) 76(22.491,-15.999) 77(22.491,-15.499) 78(22.491,-14.999) 79(22.491,-14.499) 80(22.491,-13.999) 81(22.491,-13.499) 82(22.491,-12.999) 83(22.491,-12.499) 84(22.491,-11.999) 85(22.491,-11.499) 86(22.491,-10.999) 87(22.491,-10.499) 88(22.491,-9.999) 89(22.491,-9.499) 90(22.491,-8.999) 91(22.491,-8.499) 92(22.491,-7.999) 93(22.491,-7.499) 94(22.491,-6.999) 95(22.491,-6.499) 96(22.491,-5.999) 97(22.491,-5.499) 98(22.491,-4.999) 99(22.491,-4.499) 100(22.491,-3.999) 101(22.491,-3.499) 102(22.491,-2.999) 103(22.491,-2.499) 104(22.491,-1.999) 105(22.491,-1.499) 106(22.491,-0.999) 107(22.491,-0.499) 108(22.491,0.001)
  rect 0.254x1.8 smd: 37(2.491,-19.999) 38(2.991,-19.999) 39(3.491,-19.999) 40(3.991,-19.999) 41(4.491,-19.999) 42(4.991,-19.999) 43(5.491,-19.999) 44(5.991,-19.999) 45(6.491,-19.999) 46(6.991,-19.999) 47(7.491,-19.999) 48(7.991,-19.999) 49(8.491,-19.999) 50(8.991,-19.999) 51(9.491,-19.999) 52(9.991,-19.999) 53(10.491,-19.999) 54(10.991,-19.999) 55(11.491,-19.999) 56(11.991,-19.999) 57(12.491,-19.999) 58(12.991,-19.999) 59(13.491,-19.999) 60(13.991,-19.999) 61(14.491,-19.999) 62(14.991,-19.999) 63(15.491,-19.999) 64(15.991,-19.999) 65(16.491,-19.999) 66(16.991,-19.999) 67(17.491,-19.999) 68(17.991,-19.999) 69(18.491,-19.999) 70(18.991,-19.999) 71(19.491,-19.999) 72(19.991,-19.999) 109(19.991,2.501) 110(19.491,2.501) 111(18.991,2.501) 112(18.491,2.501) 113(17.991,2.501) 114(17.491,2.501) 115(16.991,2.501) 116(16.491,2.501) 117(15.991,2.501) 118(15.491,2.501) 119(14.991,2.501) 120(14.491,2.501) 121(13.991,2.501) 122(13.491,2.501) 123(12.991,2.501) 124(12.491,2.501) 125(11.991,2.501) 126(11.491,2.501) 127(10.991,2.501) 128(10.491,2.501) 129(9.991,2.501) 130(9.491,2.501) 131(8.991,2.501) 132(8.491,2.501) 133(7.991,2.501) 134(7.491,2.501) 135(6.991,2.501) 136(6.491,2.501) 137(5.991,2.501) 138(5.491,2.501) 139(4.991,2.501) 140(4.491,2.501) 141(3.991,2.501) 142(3.491,2.501) 143(2.991,2.501) 144(2.491,2.501)
  silkscreen extent -0.81,-20.8 23.29,3.3
LT1117SMD [mil]
  rect 60x60 smd: 1(50,60) 2(150,60) 3(250,60)
  rect 236.22x157.48 smd: 4(150,270)
  silkscreen extent 0,0 300,355
RES_0603 [mm]
  rect 0.9x0.9 smd: 1(-0.787,0) 2(0.813,0)
  silkscreen extent -1.49,-0.7 1.51,0.7
RJ11-4 [mm]
  round 2.2 hole 2.5: 0(-16.179,-0.9) 0(28.321,-0.9)
  rect 1.4x1.6 hole 0.9: 1(-12.779,-5.175) 7(-1.779,-5.175) 13(9.221,-5.175) 19(20.221,-5.175)
  oval 1.4x1.6 hole 0.9: 2(-11.779,-2.921) 3(-10.779,-5.175) 4(-9.779,-2.921) 5(-8.779,-5.175) 6(-7.779,-2.921) 8(-0.779,-2.921) 9(0.221,-5.175) 10(1.221,-2.921) 11(2.221,-5.175) 12(3.221,-2.921) 14(10.221,-2.921) 15(11.221,-5.175) 16(12.221,-2.921) 17(13.221,-5.175) 18(14.221,-2.921) 20(21.221,-2.921) 21(22.221,-5.175) 22(23.221,-2.921) 23(24.221,-5.175) 24(25.221,-2.921)
  silkscreen extent -16.18,-8.4 28.32,6.6
SIP2#1 [mil]
  oval 70x60 hole 32: 1(0,0)
  oval 60x70 hole 32: 2(0,-100)
  silkscreen extent -50,-148 50,50
SIP2#2 [mil]
  rect 70x70 hole 32: 1(0,0)
  round 70 hole 32: 2(0,-100)
  silkscreen extent -50,-148 50,50
SIP2CON [mil]
  rect 70x70 hole 32: 1(0,0)
  round 70 hole 32: 2(100,0)
  silkscreen extent -85,-100 185,140
SO-8 [mil]
  rect 100x24 smd: 1(0,0)
  oval 100x24 smd: 2(0,-50) 3(0,-100) 4(0,-150) 5(220,-150) 6(220,-100) 7(220,-50) 8(220,0)
  silkscreen extent 60,-175 160,25
SOT23-4 [mil]
  rect 46x46 smd: 1(0,0)
  rect 46x36 smd: 2(0,-70) 3(86,-70) 4(86,5)
  silkscreen extent 13,-98 73,33
SOT23-6New [mm]
  rect 0.6x1.2 smd: 1(0,0) 2(0.95,0) 3(1.9,0) 4(1.9,2.6) 5(0.95,2.6) 6(0,2.6)
  silkscreen extent -0.38,0.63 2.29,1.91
TL431(SOT23) [mil]
  rect 36x36 smd: 1(20,-85) 3(95,-85)
  rect 36x50 smd: 2(58,-5)
  silkscreen extent 0,-90 115,0
TSSOP14 [mm]
  rect 1.2x0.32 smd: 1(0,0)
  oval 1.2x0.32 smd: 2(0,-0.65) 3(0,-1.3) 4(0,-1.95) 5(0,-2.6) 6(0,-3.25) 7(0,-3.9) 8(6.4,-3.9) 9(6.4,-3.25) 10(6.4,-2.6) 11(6.4,-1.95) 12(6.4,-1.3) 13(6.4,-0.65) 14(6.4,0)
  silkscreen extent 1,-4.4 5.4,0.6
USB-A [mm]
  rect 1.5x1.778 hole 0.9: 1(-3.5,0)
  oval 1.5x1.778 hole 0.9: 2(-1,0) 3(1,0) 4(3.5,0)
  oval 3x3.5 hole 2.5: 5(-6.6,-2.8) 6(6.6,-2.8)
  silkscreen extent -6.6,-13 6.6,1.2
USB_MINI_5P_DIP [mm]
  round 1.2 hole 0.7: 1(5.3,-0.92) 2(4.5,0.28) 3(3.7,-0.92) 4(2.9,0.28) 5(2.1,-0.92)
  oval 2x3 hole 1.5: ""(0,0) ""(0,4.75) ""(7.4,4.75)
  oval 1.2x3 hole 0.6 slot 1.5 at 90 deg: ""(7.4,0)
  silkscreen extent -1.6,-2 9,8
WSON8 [mm]
  rect 1.25x0.6 smd: 1(0,0)
  oval 1.25x0.6 smd: 2(0,-1.27) 3(0,-2.54) 4(0,-3.81) 5(7.747,-3.81) 6(7.747,-2.54) 7(7.747,-1.27) 8(7.747,0)
  silkscreen extent -0.64,-4.9 8.35,1.1
XTAL_5032 [mm]
  rect 1.2x1.2 smd: 1(0.279,-2.91) 2(4.721,-0.305) 3(4.721,-2.91) 4(0.279,-0.305)
  silkscreen extent 0,-3.2 5,0

## Part data
C1 C2 C3 C4 C5 C6 C7 C8 C9 C10 C11 C12 C13 C14 C15 C16 C17 C18 C19 C20 C21 C22 C23 C24 C25 C26 C27 C28 C29 C30 C31 C32 C33 C34 C35 C36 C37 C38 C39 C40 C41 C42 C43 C44 C45 C46 C47 C48 C49 C50 C51 C52 C53 C54 C55 C56 C57 C58 C59 C60 C61 C62 C63 C64 C65 C66 C67 C68 C69 C70 C71 C72 C73 C74 C75 C76 C77 C78 C79 C80 C81 C82 C83 C84 C85: library part CAP, "Capacitor"
D1 D2 D3 D4: library part BANQIAO-A, "DIODE BRIDGE"
D6 D7 D8 D10 D11: library part DIODE, "DIODE"
E1 E2 E3 E4 E5 E6 E7: library part CAP2, "Bi-Polar Capacitor"
F1 F2 F3 F4: "Fuse"
J1 J3 J10 J13: "SOCKET"
J2: library part CON12, "SOCKET"
J4: "Header, 3-Pin, Dual row"
J5 J6 J7 J8: library part LEGO_RJ11_IN, "LEGO_RJ11_IN"
J9: library part RJ11-4
J11: library part CON3Mini
J12: library part USB_A, "USB_A"
L1 L2 L3: library part INDUCTOR, "Inductor"
LCD1: library part UC1638
Q2 Q7 Q8 Q9 Q10 Q12: library part NPN, "triode"
Q3 Q4 Q5 Q6: library part PNP, "triode"
Q11: "N-Channel MOSFET"
R1 R2 R3 R4 R5 R6 R7 R8 R9 R10 R11 R12 R13 R14 R15 R16 R17 R18 R19 R20 R21 R22 R23 R24 R25 R26 R27 R28 R29 R30 R31 R32 R33 R34 R35 R36 R37 R38 R39 R40 R41 R42 R43 R44 R45 R46 R47 R48 R49 R50 R51 R52 R53 R54 R55 R56 R57 R58 R59 R60 R61 R62 R63 R64 R65 R66 R67 R68 R69 R70 R71 R72 R73 R74 R75 R76 R77 R78 R79 R80 R81 R82 R83 R84 R85 R86 R87 R88 R89 R90 R91 R92 R93 R94 R95 R96 R97 R99 R100 R101 R102 R103 R104 R105 R106 R107 R108 R109 R110 R111 R112 R113 R114 R115 R116 R117 R118 R119 R120 R121 R122 R123 R124 R125 R126 R127 R128 R129 R130 R131 R132 R133 R134 R135 R136 R137 R138 R139 R140 R141 R142 R143 R144 R145 R146 R147 R148 R149 R150 R151 R152 R153 R154 R155 R156 R157 R158 R159 R160 R161 R162 R163 R164 R165 R166 R167 R168 R169 R170 R171 R172 R173 R174 R310 R311: library part RES, "Resistor"
R98: "Resistor"
U2: library part 25P16
U3: "Adjustable Precision Shunt Regulator"
U4 U5: "Quad Bus Buffer Gate with 3-State Output"
U6 U7: library part LM1836
U14: library part VS1053
USB1: library part USB_MICRO_B, "USB_MICRO_B"
Y1 Y2: library part XTAL, "CRYSTAL"

## Free pads (board coordinates)
  oval 2.5x4 hole 1.016 slot 3 at 90 deg: 0(1.546,93.6)
  round 3 hole 2: 0(37.084,74.93)
  oval 2x3 hole 1.016 slot 2.5 at 90 deg: 1(1.778,14.613)

## Via types
v1: diameter 0.762, hole 0.381, Top Layer to Bottom Layer, 258 vias
v2: diameter 1.27, hole 0.635, Top Layer to Bottom Layer, 91 vias
v3: diameter 1.016, hole 0.508, Top Layer to Bottom Layer, 66 vias
v4: diameter 1.524, hole 0.635, Top Layer to Bottom Layer, 1 vias

## Nets (pads, with @x,y where several pads share a name; then routed paths per layer and width w, separated by ;. In a path a pad name is that pad's centre, name@x,y a point inside that pad or via, vN(x,y) a via of type N, cw(c..) or ccw(c..) an arc to the next point about the centre after c; other vN are vias at no path point)
1OUTA1: J9.1 U6.3 | length 35
  Top Layer w0.508: 5.819,97.488 cw(c8.268,97.488) J9.1@6.536,99.22 ; 5.819,98.715 cw(c7.042,98.715) J9.1@6.177,99.58 ; J9.1@5.819,99.136 5.819,84.732 6.731,83.82 11.811,83.82 12.7,82.931 16.637,82.931 v3(17.018,82.55) ; 15.485,82.931 cw(c15.485,81.017) v3@16.838,82.37
  Bottom Layer w0.406: U6.3@16.694,80.366 16.694,81.21 17.018,81.534 v3(17.018,82.55) ; U6.3@16.741,80.916 cw(c17.566,80.916) 16.983,81.499 ; v3@16.802,82.334 cw(c16.282,81.814) 17.018,81.814 cw(c17.754,81.814) v3@17.234,82.334
1OUTA2: J9.2 R109.2 R111.2 U6.5 | length 42.6
  Top Layer w0.508: 6.096,83.058 6.223,82.931 11.303,82.931 12.446,81.788 v3@14.478,81.788 ; 13.558,81.788 ccw(c13.558,82.835) v3@14.298,82.095
  Top Layer w0.635: 6.096,83.058 4.953,84.201 4.953,92.71 4.318,93.345 4.318,100.838 5.37,101.89 J9.2@7.221,101.89 ; J9.2@6.951,101.619 ccw(c6.298,100.966) 6.298,101.89 ccw(c6.298,102.813) J9.2@6.951,102.16
  Bottom Layer w0.406: v3@14.262,81.699 cw(c13.22,80.657) U6.5@14.694,80.657 ; v3@14.478,81.788 14.694,81.572 U6.5@14.694,80.366
  Bottom Layer w0.508: R109.2@6.503,103.683 R111.2@7.925,103.682 ; R109.2@6.641,103.544 cw(c6.975,103.211) 6.975,103.682 ; R109.2@6.641,103.822 ccw(c6.977,104.158) 6.977,103.682 ; R111.2@7.786,103.544 ccw(c7.452,103.209) 7.452,103.682 ccw(c7.452,104.156) R111.2@7.786,103.821
  Bottom Layer w0.762: R109.2@6.503,103.429 6.503,102.87 7.221,102.152 J9.2@7.221,101.89 ; 6.562,102.811 cw(c5.74,101.99) J9.2@6.902,101.99 ; R109.2@6.568,103.66 ccw(c7.56,103.304) 6.814,102.558
  other v3: 14.478,81.915
1OUTB1: J9.7 U6.12 | length 24.6
  Top Layer w0.508: 16.819,97.488 cw(c19.268,97.488) J9.7@17.536,99.22 ; 16.819,98.715 cw(c18.042,98.715) J9.7@17.177,99.58 ; J9.7@16.819,99.136 16.819,96.973 18.415,95.377 18.415,85.725 v3(17.145,84.455) ; v3@17.145,84.709 ccw(c17.145,85.322) 17.579,84.889 ccw(c18.012,84.455) v3@17.399,84.455
  Bottom Layer w0.406: 16.694,85.298 ccw(c17.988,85.298) v3@17.073,84.383 ; U6.12@16.694,86.279 ccw(c18.969,86.279) v3@17.361,84.671 ; U6.12@16.694,86.306 16.694,84.906 v3(17.145,84.455)
1OUTB2: J9.8 R110.2 R112.2 U6.10 | length 38.3
  Top Layer w0.508: v3(14.478,84.455) 14.732,84.709 15.621,84.709 ; v3@14.667,84.285 cw(c15.621,83.423) 15.621,84.709 ; 15.875,101.6 16.165,101.89 ; J9.8@17.906,101.574 ccw(c17.144,100.813) 17.144,101.89 ccw(c17.144,102.966) J9.8@17.906,102.205 ; J9.8@18.221,101.89 16.165,101.89 ; 15.621,84.709 17.526,86.614 17.526,94.869 15.494,96.901 15.494,101.219 16.165,101.89
  Bottom Layer w0.406: v3@14.262,84.671 ccw(c13.22,85.713) U6.10@14.694,85.713 ; v3@14.427,84.506 14.694,84.773 U6.10@14.694,86.306
  Bottom Layer w0.508: R110.2@17.154,103.527 cw(c16.139,102.188) J9.8@17.819,102.188 ; R110.2@17.272,103.683 17.78,103.683 ; R110.2@17.411,103.544 cw(c17.746,103.21) 17.746,103.683 cw(c17.746,104.156) R110.2@17.411,103.822 ; R110.2@17.461,103.932 cw(c16.914,103.211) 17.819,103.211 ; 17.819,102.653 ccw(c18.698,102.653) J9.8@18.185,101.939 ; J9.8@18.221,101.89 17.819,102.292 17.819,103.644 ; 18.322,103.683 cw(c18.322,103.208) R112.2@18.658,103.544 ; 18.324,103.683 ccw(c18.324,104.154) R112.2@18.658,103.821 ; J9.8@18.481,102.352 cw(c19.411,103.644) 17.819,103.644 ; R112.2@18.796,103.682 17.78,103.683 ; 17.78,103.683 17.819,103.644
1OUTC1: J9.13 U7.3 | length 40.3
  Top Layer w0.406: 26.924,94.742 27.305,94.361 27.305,90.17 27.94,89.535 27.94,87.884 28.702,87.122 28.702,84.328 29.21,83.82 33.655,83.82
  Top Layer w0.508: 25.927,99.031 ccw(c25.927,101.83) J9.13@27.906,99.851 ; 26.924,94.742 25.146,96.52 25.146,98.552 25.625,99.031 27.715,99.031 J9.13@27.819,99.136 ; 27.153,99.031 ccw(c27.153,100.604) J9.13@28.265,99.492 ; 33.655,83.82 34.29,83.185 36.83,83.185 37.973,82.042 v3(38.735,82.042) ; 37.211,82.804 ccw(c38.477,84.07) v3@38.703,82.294 ; 37.943,82.072 ccw(c38.642,82.77) v3@38.767,81.79 ; v3@38.555,81.862 ccw(c38.122,81.429) 38.122,82.042 ccw(c38.122,82.655) v3@38.555,82.222
  Bottom Layer w0.406: U7.3@38.437,80.366 38.437,81.744 v3(38.735,82.042) ; U7.3@38.437,80.586 cw(c40.191,80.586) v3@38.951,81.826 ; 38.437,81.567 cw(c39.21,81.567) v3@38.663,82.114
1OUTC2: J9.14 R127.2 R129.2 U7.5 | length 45.8
  Top Layer w0.406: 25.908,94.361 26.543,93.726 26.543,89.916 27.178,89.281 27.178,87.503 28.067,86.614 28.067,83.947 28.829,83.185 33.274,83.185 34.417,82.042 34.798,82.042
  Top Layer w0.508: 25.908,94.361 24.384,95.885 24.384,99.06 26.714,101.39 J9.14@28.819,101.39 ; 27.179,101.39 ccw(c27.179,103.832) J9.14@28.906,102.105 ; 28.405,101.39 ccw(c28.405,102.606) J9.14@29.265,101.746 ; 34.798,82.042 v3(36.195,82.042) ; v3@36.015,81.862 ccw(c35.582,81.429) 35.582,82.042 ccw(c35.582,82.655) v3@36.015,82.222
  Bottom Layer w0.406: v3@35.979,81.826 cw(c34.875,80.722) U7.5@36.437,80.722 ; v3(36.195,82.042) 36.437,81.8 U7.5@36.437,80.366
  Bottom Layer w0.508: R127.2@28.716,103.544 cw(c28.382,103.21) 28.855,103.21 cw(c29.328,103.21) 28.993,103.544 cw(c29.328,103.21) 29.328,103.683 cw(c29.328,104.156) R127.2@28.993,103.822 ; 28.855,102.624 ccw(c29.73,102.624) J9.14@29.182,101.941 ; J9.14@29.221,101.89 28.855,102.256 R127.2@28.855,103.683 ; J9.14@29.5,102.338 cw(c30.58,103.683) R127.2@28.855,103.683 ; 29.904,103.683 cw(c29.904,103.208) R129.2@30.24,103.544 ; 29.907,103.683 ccw(c29.907,104.154) R129.2@30.24,103.821 ; R129.2@30.379,103.682 R127.2@28.855,103.683
1OUTD1: J9.19 U7.12 | length 18.2
  Bottom Layer w0.406: U7.12@38.437,86.306 38.437,87.484 38.71,87.757 38.71,88.392
  Bottom Layer w0.508: J9.19@38.55,99.136 ccw(c38.55,100.033) J9.19@39.271,99.499 ; 38.71,88.392 38.71,91.719 36.957,93.472 36.957,98.552 37.541,99.136 ; J9.19@38.863,99.801 cw(c37.541,100.781) 37.541,99.136 ; J9.19@39.221,99.636 38.721,99.136 37.541,99.136
1OUTD2: J9.20 R128.2 R130.2 U7.10 | length 28.7
  Bottom Layer w0.406: U7.10@36.437,86.306 36.449,86.318 36.449,87.376 36.83,87.757
  Bottom Layer w0.508: 36.83,87.757 37.719,88.646 37.719,91.44 36.17,92.989 36.17,99.162 38.898,101.89 J9.20@40.221,101.89 39.624,102.486 39.624,103.428 ccw(c40.692,103.428) J9.20@40.36,102.414 ; R128.2@38.202,103.683 R130.2@39.624,103.682 ; R128.2@38.341,103.544 cw(c38.675,103.21) 38.675,103.683 cw(c38.675,104.156) R128.2@38.341,103.822 ; 39.15,103.683 cw(c39.15,103.208) 39.486,103.544 cw(c39.151,103.209) 39.624,103.209 cw(c40.097,103.209) R130.2@39.763,103.544 ; 39.152,103.683 ccw(c39.152,104.154) R130.2@39.486,103.821 ; 39.624,102.727 ccw(c40.463,102.727) J9.20@40.202,101.931 ; J9.20@39.906,101.574 ccw(c39.144,100.813) 39.144,101.89 ccw(c39.144,102.966) J9.20@39.906,102.205
ADC_A0: R37.2 R45.2 U1.14 | length 47.8
  Top Layer w0.254: v1(20.701,46.228) 20.774,46.228 U1.14@24.401,49.855 ; v1@20.701,46.482 ccw(c20.701,47.271) 21.259,46.713 ; v1@20.955,46.228 cw(c21.392,46.228) 21.083,46.537
  Bottom Layer w0.254: R45.2@5.415,16.833 ccw(c4.385,17.863) 5.842,17.863 ; R45.2@5.595,16.653 ccw(c4.998,17.25) 5.842,17.25 ; R45.2@5.644,16.604 5.842,16.803 5.842,25.019 5.842,26.543 5.842,29.845 20.701,44.704 v1(20.701,46.228) ; v1@20.521,46.048 cw(c20.088,45.615) 20.701,45.615 cw(c21.314,45.615) v1@20.881,46.048
  Bottom Layer w0.508: R37.2@4.12,16.604 R45.2@5.644,16.604 ; R37.2@4.258,16.466 cw(c4.593,16.131) 4.593,16.604 cw(c4.593,17.077) R37.2@4.258,16.743 ; R45.2@5.505,16.466 ccw(c5.17,16.131) 5.17,16.604 ccw(c5.17,17.077) R45.2@5.505,16.743
ADC_A1: C36.2 R88.2 R94.1 U1.15 | length 43.4
  Top Layer w0.254: v1@21.283,45.519 ccw(c20.85,45.952) 21.463,45.952 ccw(c22.076,45.952) v1@21.643,45.519 ; v1(21.463,45.339) 21.463,46.21 U1.15@24.755,49.502
  Top Layer w0.508: R94.1@6.903,25.508 cw(c6.568,25.174) 7.041,25.174 cw(c7.515,25.174) R94.1@7.18,25.508 ; v1(7.041,24.821) R94.1@7.041,25.647 ; R94.1@7.112,25.527 C36.2@8.483,25.527 ; R94.1@7.18,25.785 ccw(c7.804,26.41) 7.804,25.527 ; 7.733,25.527 ccw(c7.733,26.334) C36.2@8.303,25.763 ; R88.2@8.3,23.728 ccw(c7.965,24.062) 8.438,24.062 ccw(c8.912,24.062) R88.2@8.577,23.728 ; C36.2@8.303,25.486 cw(c7.977,25.16) 8.438,25.16 ; R88.2@8.438,23.589 8.438,25.621 C36.2@8.442,25.625 ; 8.438,25.143 cw(c8.924,25.143) C36.2@8.581,25.486
  Bottom Layer w0.254: 6.35,28.956 6.35,28.575 ; v1@6.787,24.821 ccw(c6.174,24.821) 6.608,25.255 ccw(c7.041,25.689) v1@7.041,25.075 ; v1(7.041,24.821) 6.35,25.513 6.35,28.575 ; v1@21.311,45.136 cw(c21.082,44.831) 21.463,44.831 ; v1(21.463,45.339) 21.463,44.831 ; v1@21.615,45.136 ccw(c21.844,44.831) 21.463,44.831 ; 6.35,28.575 6.35,29.718 21.463,44.831
ADC_B0: R38.2 R46.2 U1.27 | length 53.9
  Top Layer w0.254: v1(15.875,30.861) 16.002,30.988 21.056,30.988 v1(21.437,31.369) ; v1@16.055,30.681 cw(c16.795,29.941) 16.795,30.988 ; 25.061,41.952 ccw(c25.496,41.518) v1(24.892,41.402) 24.892,41.783 25.4,42.291 ; v1@25.141,41.45 cw(c26.065,41.626) 25.4,42.291 ; U1.27@28.998,45.259 26.029,42.291 25.4,42.291
  Bottom Layer w0.254: v1@15.87,30.607 ccw(c15.882,31.202) 16.303,30.781 ; v1@15.88,31.115 ccw(c15.918,32.85) 17.145,31.623 ; v1@16.078,30.709 cw(c16.383,30.48) 16.383,30.861 ; v1@16.078,31.013 ccw(c16.383,31.242) 16.383,30.861 ; 16.724,31.202 cw(c15.9,32.026) v1(15.875,30.861) 16.383,30.861 ; R46.2@21.209,16.891 ccw(c20.657,17.442) 21.437,17.442 ccw(c22.217,17.442) R46.2@21.666,16.891 ; v1@21.258,31.189 cw(c20.824,30.756) 21.437,30.756 cw(c22.05,30.756) v1@21.617,31.189 ; R46.2@21.437,16.662 v1(21.437,31.369) ; 24.189,40.318 ccw(c23.105,41.402) v1@24.638,41.402 ; 24.623,40.752 ccw(c23.972,41.402) v1(24.892,41.402) 24.892,41.021 17.145,33.274 17.145,31.623 ; 16.383,30.861 17.145,31.623
  Bottom Layer w0.508: R38.2@20.015,16.662 R46.2@21.437,16.662 ; R38.2@20.153,16.524 cw(c20.488,16.189) 20.488,16.662 cw(c20.488,17.135) R38.2@20.153,16.801 ; R46.2@21.299,16.524 ccw(c20.964,16.189) 20.964,16.662 ccw(c20.964,17.135) R46.2@21.299,16.801
ADC_B1: C37.2 R90.2 R95.1 U1.26 | length 56.7
  Top Layer w0.254: v1@14.732,31.115 ccw(c14.732,32.035) 15.382,31.384 ; v1@14.859,30.861 15.621,31.623 16.51,31.623 16.637,31.496 20.32,31.496 20.955,32.131 23.368,32.131 v1(24.638,30.861) ; v1@14.986,30.861 cw(c15.293,30.861) 15.076,31.078 ; 24.056,41.709 ccw(c24.489,41.275) v1(23.876,41.275) 23.876,41.529 25.146,42.799 25.83,42.799 U1.26@28.644,45.613 ; v1@24.13,41.275 cw(c25.356,41.275) 24.489,42.142 ; v1@24.384,30.861 ccw(c23.771,30.861) 24.204,31.295 ccw(c24.638,31.728) v1@24.638,31.115 ; R95.1@24.588,25.629 C37.2@25.991,25.629 ; R95.1@24.816,25.4 cw(c25.367,24.849) 25.367,25.629 cw(c25.367,26.408) R95.1@24.816,25.857 ; 25.18,25.629 cw(c25.18,24.773) C37.2@25.785,25.378 ; 25.287,25.629 ccw(c25.287,26.333) C37.2@25.785,25.835 ; C37.2@26.003,25.538 cw(c25.906,24.909) v1@26.543,24.909 ; C37.2@26.014,25.606 v1@26.543,25.077 ; C37.2@26.023,25.284 cw(c26.044,24.578) v1@26.543,25.077 ; C37.2@26.322,25.298 cw(c25.79,24.765) v1(26.543,24.765) v1@26.543,25.077 ; C37.2@26.336,25.597 ccw(c27.042,25.576) v1@26.543,25.077
  Top Layer w0.508: R90.2@24.449,23.811 ccw(c24.061,24.199) 24.61,24.199 ; R95.1@24.449,25.49 cw(c24.061,25.102) 24.61,25.102 ; R95.1@24.588,25.629 24.61,25.606 R90.2@24.61,23.695
  Bottom Layer w0.254: v1(14.732,30.861) 15.621,31.75 16.256,31.75 16.637,32.131 16.637,33.401 23.876,40.64 v1(23.876,41.275) ; v1@14.732,31.115 ccw(c14.732,31.728) 15.166,31.295 ccw(c15.599,30.861) v1@14.986,30.861 ; v1@23.696,41.095 cw(c23.263,40.662) 23.876,40.662 cw(c24.489,40.662) v1@24.056,41.095 ; v1@24.638,30.607 cw(c24.638,29.994) 25.072,30.427 cw(c25.505,30.861) v1@24.892,30.861 ; v1(24.638,30.861) 25.781,29.718 25.781,27.559 26.035,27.305 26.035,25.654 26.289,25.4 ; 26.289,25.082 ccw(c26.614,25.082) v1(26.543,24.765) 26.289,25.019 26.289,25.4 ; v1@26.599,25.013 cw(c26.686,25.4) 26.289,25.4
ADC_C0: R39.2 R47.2 U1.41 | length 32.2
  Top Layer w0.254: U1.41@37.129,43.492 38.227,42.394 38.227,39.243 37.998,39.014 37.998,36.347 v1(37.592,35.941)
  Bottom Layer w0.254: R39.2@36.347,21.463 ccw(c35.553,22.256) 36.676,22.256 ; 36.676,21.772 ccw(c37.113,21.772) 36.804,21.463 ccw(c37.355,22.014) 37.355,21.234 ccw(c37.355,20.454) R39.2@36.804,21.006 ; 37.636,35.389 cw(c37.937,35.691) v1(37.592,35.941) 37.592,35.433 ; R47.2@37.77,21.006 ccw(c37.218,20.454) 37.218,21.234 ccw(c37.218,22.014) R47.2@37.77,21.463 ; v1@37.798,35.792 ccw(c38.181,35.514) 37.846,35.179 ; R47.2@37.973,21.259 R47.2@37.998,21.234 R39.2@36.576,21.234 36.676,21.335 36.676,23.903 36.576,24.003 36.576,26.543 36.322,26.797 36.322,28.956 38.481,31.115 38.481,32.385 38.1,32.766 38.1,34.925 37.592,35.433 ; 37.592,35.433 cw(c37.973,35.433) 37.744,35.738 ccw(c37.973,35.433) 37.592,35.433 ; 37.592,35.433 ccw(c37.211,35.433) 37.44,35.738 cw(c37.211,35.433) 37.592,35.433
ADC_C1: C38.2 R92.2 R96.1 U1.29 | length 48.1
  Top Layer w0.254: v1@27.432,41.656 cw(c28.937,41.656) 27.873,42.72 ; 27.439,42.287 ccw(c28.07,41.656) v1(27.178,41.656) 27.178,42.025 U1.29@29.705,44.552 ; v1@27.813,36.957 cw(c27.813,36.344) 28.247,36.777 cw(c28.68,37.211) v1@28.067,37.211 ; v1(27.813,37.211) 28.829,36.195 v1(31.115,36.195) ; v1@30.935,36.015 ccw(c30.502,35.582) 30.502,36.195 ccw(c30.502,36.808) v1@30.935,36.375
  Top Layer w0.508: v1(35.814,25.527) 35.893,25.606 C38.2@36.885,25.606 38.281,25.606 R96.1@38.304,25.629 R92.2@38.304,23.673 ; v1@35.904,25.437 cw(c36.312,25.029) 36.312,25.606 ; C38.2@36.746,25.468 ccw(c36.412,25.133) 36.412,25.606 ccw(c36.412,26.08) C38.2@36.746,25.745 ; C38.2@37.023,25.468 cw(c37.358,25.133) 37.358,25.606 cw(c37.358,26.08) C38.2@37.023,25.745 ; 37.777,25.606 ccw(c37.777,26.155) R96.1@38.165,25.767 ; R92.2@38.165,23.811 ccw(c37.83,24.146) 38.304,24.146 ccw(c38.777,24.146) R92.2@38.442,23.811 ; R96.1@38.165,25.49 cw(c37.83,25.155) 38.304,25.155 cw(c38.777,25.155) R96.1@38.442,25.49
  Bottom Layer w0.254: v1(27.178,41.656) 27.94,41.656 29.083,40.513 29.083,38.227 28.067,37.211 v1(27.813,37.211) ccw(c27.813,37.824) 28.247,37.391 ; v1@27.358,41.476 cw(c27.791,41.043) 27.791,41.656 cw(c27.791,42.269) v1@27.358,41.836 ; v1@27.813,37.465 ccw(c27.813,38.691) 28.68,37.824 ; v1@30.861,36.068 30.988,36.195 v1(31.115,36.195) 36.068,36.195 37.592,34.671 37.592,32.639 37.973,32.258 37.973,31.242 35.814,29.083 v1(35.814,25.527) ; v1@31.295,36.015 cw(c31.728,35.582) 31.728,36.195 cw(c31.728,36.808) v1@31.295,36.375 ; v1@35.634,25.707 ccw(c35.201,26.14) 35.814,26.14 ccw(c36.427,26.14) v1@35.994,25.707
ADC_D0: R40.2 R48.2 U1.43 | length 45.5
  Top Layer w0.254: U1.43@37.836,44.199 39.243,42.792 39.243,37.084 39.497,36.83 v1(39.497,35.306) ; v1@39.317,35.486 ccw(c38.884,35.919) 39.497,35.919 ccw(c40.11,35.919) v1@39.677,35.486 ; v1@40.005,32.385 41.148,32.385 42.164,31.369 44.45,31.369 44.958,31.877 v1(48.895,31.877) ; v1@40.185,32.692 ccw(c40.925,33.432) 40.925,32.385 ; v1@48.715,31.697 ccw(c48.282,31.264) 48.282,31.877 ccw(c48.282,32.49) v1@48.715,32.057
  Bottom Layer w0.254: 39.243,34.08 cw(c40.723,34.08) v1@39.677,35.126 ; 39.243,34.693 cw(c40.11,34.693) v1(39.497,35.306) 39.243,35.052 39.243,33.274 v1(40.005,32.512) ; v1@39.751,32.512 ccw(c39.138,32.512) 39.571,32.946 ccw(c40.005,33.379) v1@40.005,32.766 ; v1(48.895,31.877) 49.276,31.496 49.276,28.829 49.53,28.575 49.53,25.781 49.276,25.527 49.276,23.876 50.419,22.733 ; R48.2@49.869,21.471 ccw(c48.697,22.733) 50.419,22.733 ; R48.2@50.041,21.285 ccw(c49.238,22.15) 50.419,22.15 ; R48.2@50.088,21.234 50.138,21.284 50.419,21.565 50.419,22.733 ; R48.2@50.214,21.099 ccw(c49.778,21.568) R48.2@50.419,21.568
  Bottom Layer w0.508: R40.2@48.666,21.234 R48.2@50.088,21.234 ; R40.2@48.805,21.576 ccw(c49.63,22.401) 49.63,21.234 ; R48.2@49.95,21.096 ccw(c49.615,20.761) 49.615,21.234 ccw(c49.615,21.707) R48.2@49.95,21.373